# Altium PCB Ninja_ECU_PCB.PcbDoc (part 3 of 3)
Units mm, origin at the board's own origin, x right, y up, seen from the top; angles counter-clockwise.
Board outline 80.01 x 89.03 mm, 4 copper layers (Top Layer, Signal Layer 1, Signal Layer 2, Bottom Layer), stack 0.778 mm thick; 215 components, 159 nets, 825 pads, 332 vias.
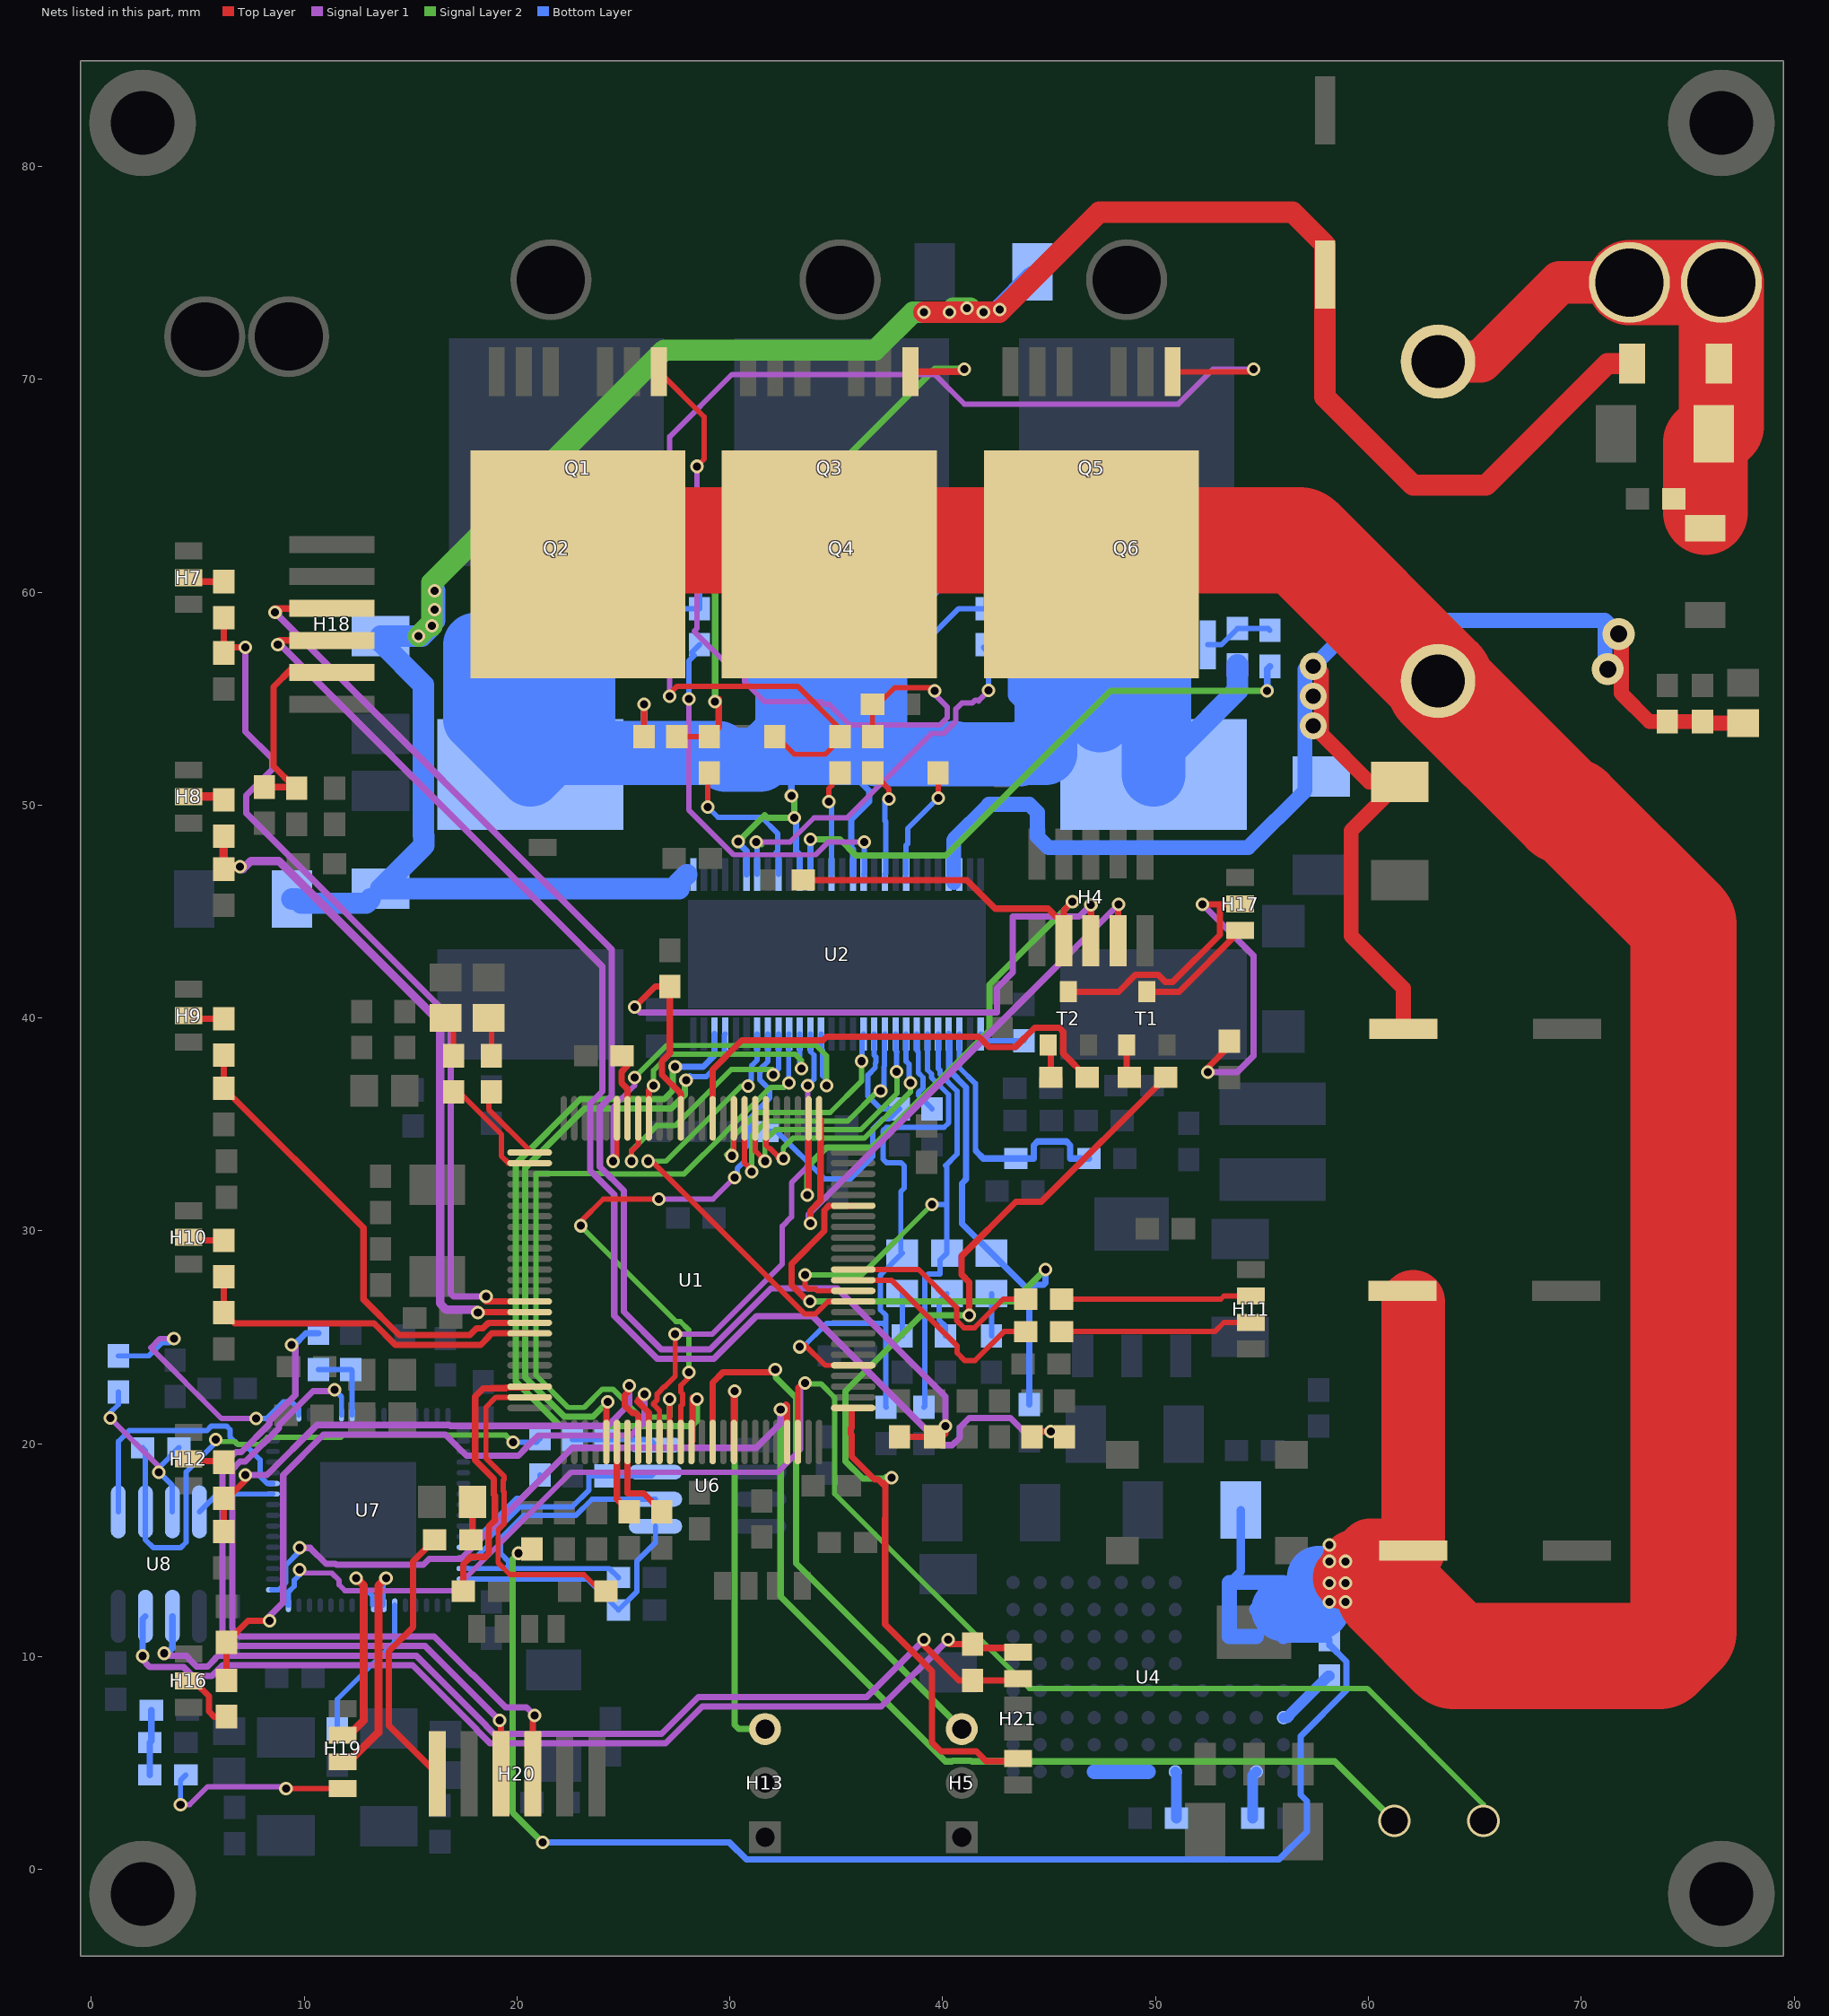
[diagram p5: the nets of this part, all layers, seen from the top]

## Via types
v1: diameter 0.635, hole 0.381, Top Layer to Bottom Layer, tented both sides, 252 vias
v2: diameter 0.584, hole 0.33, Top Layer to Bottom Layer, 44 vias
v3: diameter 0.69, hole 0.381, Top Layer to Bottom Layer, tented both sides, 16 vias
v4: diameter 1.016, hole 0.762, Top Layer to Bottom Layer, tented both sides, 11 vias
v5: diameter 1.5, hole 0.8, Top Layer to Bottom Layer, tented both sides, 3 vias
v6: diameter 1.27, hole 0.711, Top Layer to Bottom Layer, tented both sides, 3 vias
v7: diameter 1.524, hole 1.27, Top Layer to Bottom Layer, 2 vias
v8: diameter 0.635, hole 0.381, Top Layer to Bottom Layer, 1 vias

## Nets (pads, with @x,y where several pads share a name; then routed paths per layer and width w, separated by ;. In a path a pad name is that pad's centre, name@x,y a point inside that pad or via, vN(x,y) a via of type N, cw(c..) or ccw(c..) an arc to the next point about the centre after c; other vN are vias at no path point) (continued)
NetH4_4: H4.4 U1.76 | length 27.9
  Top Layer w0.3: v1(33.782,30.353) 33.782,30.952 34.258,31.428 34.258,35.222 U1.76@34.194,35.286 ; H4.4@48.235,43.637 48.235,45.314 v1(48.26,45.339)
  Signal Layer 1 w0.3: v1(33.782,30.353) 33.748,30.353 33.701,30.399 33.701,30.78 42.728,39.807 42.732,39.807 48.26,45.334 v1(48.26,45.339)
NetH4_6: H4.6 R2.2 U1.89 | length 36.3
  Top Layer w0.3: v1(25.527,40.513) 26.494,41.48 R2.2@27.178,41.48 27.178,38.336 26.812,37.97 26.812,37.335 27.683,36.464 27.694,36.464 U1.89@27.694,35.286 ; H4.6@46.965,43.637 v1(46.965,45.314)
  Signal Layer 1 w0.3: v1(25.527,40.513) 25.781,40.259 42.545,40.259 42.545,41.402 43.286,42.143 43.286,44.762 46.413,44.762 v1(46.965,45.314)
NetH4_8: H4.8 R1.2 U1.77 | length 39.9
  Top Layer w0.3: R1.2@33.45,46.482 41.13,46.482 42.473,45.14 44.95,45.14 45.466,44.623 45.466,43.866 H4.8@45.695,43.637 45.695,45.06 v1(46.101,45.466) ; v1(33.638,31.685) 33.694,31.741 33.694,32.258 U1.77@33.694,35.286
  Signal Layer 1 w0.3: v1(33.638,31.685) 33.638,31.654 33.607,31.623 v1@33.701,31.529
  Signal Layer 2 w0.3: v1(33.638,31.685) 33.638,33.02 34.543,33.925 36.702,33.925 42.2,39.423 42.2,41.565 v1(46.101,45.466)
NetH5_3: H5.3 U1.40 | length 26.5
  Top Layer w0.3: U1.40@29.194,20.086 29.194,22.876 29.686,23.368 v1@32.131,23.368
  Signal Layer 2 w0.3: v1(32.131,23.495) 32.164,23.462 32.164,23.112 33.114,22.161 33.114,14.384 H5.3@40.894,6.604
NetH7_2: H7.2 R11.2 | length 1.5
  Top Layer w0.3: H7.2@4.757,60.501 R11.2@6.223,60.501
NetH8_2: H8.2 R13.2 | length 1.7
  Top Layer w0.4: H8.2@4.572,50.399 6.073,50.399 R13.2@6.223,50.249
NetH9_2: H9.2 R15.2 | length 1.7
  Top Layer w0.3: H9.2@4.572,40.112 4.722,39.962 R15.2@6.223,39.962
NetH10_2: H10.2 R18.2 | length 1.7
  Top Layer w0.3: H10.2@4.572,29.698 4.722,29.548 R18.2@6.223,29.548
NetH11_2: H11.2 R17.1 | length 9
  Top Layer w0.25: R17.1@45.593,26.797 53.066,26.797 53.213,26.944 H11.2@54.483,26.944
NetH11_3: H11.3 R21.1 | length 9.1
  Top Layer w0.25: R21.1@45.593,25.273 52.787,25.273 53.213,25.699 H11.3@54.483,25.699
NetH12_2: H12.2 R23.2 | length 1.7
  Top Layer w0.3: H12.2@4.572,19.284 4.664,19.192 6.099,19.192 6.132,19.225 R23.2@6.223,19.134
NetH13_3: H13.3 U1.42 | length 19.6
  Top Layer w0.3: U1.42@30.194,20.086 30.194,22.447 v1(30.226,22.479)
  Signal Layer 2 w0.3: v1(30.226,22.479) 30.226,6.794 30.416,6.604 H13.3@31.655,6.604
NetH16_2: H16.2 R30.2 | length 2.5
  Top Layer w0.3: H16.2@4.93,8.74 5.524,8.145 5.524,7.43 5.764,7.19 R30.2@6.35,7.19
NetH17_2: H17.2 R87.2 T2.3 | length 24.4
  Top Layer w0.3: T2.3@45.908,41.235 48.263,41.235 49.066,42.037 50.116,42.037 50.466,41.687 50.8,41.687 53.023,43.91 53.023,45.339 ; v1(52.197,45.339) 53.023,45.339 ; v1(52.451,37.465) 52.451,37.673 53.467,38.689 R87.2@53.467,38.911 ; H17.2@53.975,45.359 53.721,45.105 53.721,45.116 53.498,45.339 53.023,45.339
  Signal Layer 1 w0.3: v1(52.197,45.339) 54.61,42.926 54.61,38.227 53.848,37.465 v1(52.451,37.465)
NetH17_3: H17.3 T1.3 | length 5.6
  Top Layer w0.3: T1.3@49.591,41.235 51.101,41.235 H17.3@53.975,44.109
NetH18_2: H18.2 R27.2 R32.1 | length 9.9
  Top Layer w0.3: R27.2@8.128,50.849 R32.1@9.545,50.849 ; H18.2@11.303,56.237 11.152,56.388 9.398,56.388 8.565,55.555 8.565,51.83 R32.1@9.545,50.849 ; R32.1@9.545,50.849 9.603,50.849 R32.1@9.652,50.8 9.594,50.8 R32.1@9.545,50.849
NetH18_3: H18.3 R26.2 R34.1 | length 68.1
  Top Layer w0.3: v1(8.763,57.531) 8.763,57.562 8.89,57.689 8.842,57.737 H18.3@11.303,57.737 ; R26.2@44.196,20.32 44.323,20.32 44.618,20.615 44.659,20.574 v1(45.085,20.574)
  Signal Layer 1 w0.3: v1(8.763,57.531) 8.89,57.531 24.003,42.418 24.003,36.55 23.439,35.986 23.439,32.83 24.567,31.702 24.567,26.012 26.59,23.988 29.248,23.988 31.263,26.002 33.879,26.002 39.946,19.935 40.445,19.935 40.798,20.288 40.798,20.761 41.246,21.209 43.18,21.209 43.815,20.574 v1(45.085,20.574)
NetH18_4: H18.4 R25.2 R36.1 | length 66.2
  Top Layer w0.3: v1(8.636,59.055) 8.636,59.072 8.526,59.182 8.581,59.237 H18.4@11.303,59.237 ; R36.1@37.973,20.32 R25.2@39.624,20.32 39.978,20.32 40.132,20.474 v1(40.132,20.828)
  Signal Layer 1 w0.3: v1@8.636,59.067 v1(8.636,59.055) 8.636,59.043 24.455,43.223 24.455,36.363 23.891,35.799 23.891,33.017 25.019,31.889 25.019,26.199 26.778,24.44 29.061,24.44 31.926,27.306 35.039,27.306 40.132,22.213 v1(40.132,20.828)
NetH19_1: H19.1 R61.2 | length 9.5
  Top Layer w0.25: v1(9.144,3.81) H19.1@11.811,3.81
  Signal Layer 1 w0.25: v1(4.191,3.048) 4.62,3.048 5.469,3.897 9.057,3.897 v1(9.144,3.81)
  Bottom Layer w0.25: v1(4.191,3.048) 4.191,4.191 R61.2@4.445,4.445
NetH20_3: H20.3 U7.38 | length 33.9
  Top Layer w0.3: H20.3@20.749,4.494 20.749,7.16 v1(20.828,7.239)
  Signal Layer 1 w0.3: v1(11.43,22.542) 11.43,22.479 10.414,22.479 8.815,20.88 8.815,20.74 7.237,19.162 6.982,19.162 6.619,18.799 6.619,11.325 6.989,10.955 16.109,10.955 17.904,9.159 17.929,9.159 19.468,7.62 20.447,7.62 v1(20.828,7.239)
  Bottom Layer w0.25: v1(11.43,22.542) 11.755,22.218 U7.38@11.755,21.366
NetH20_4: H20.4 R68.2 | length 34
  Top Layer w0.3: v1(19.177,7.002) 19.249,6.93 H20.4@19.249,4.494
  Signal Layer 1 w0.3: v1(9.398,24.638) 9.525,24.638 9.586,24.577 9.586,22.291 8.363,21.068 8.363,20.927 7.05,19.614 6.795,19.614 6.167,18.986 6.167,11.138 6.802,10.502 15.677,10.502 v1(19.177,7.002)
  Bottom Layer w0.3: v1(9.398,24.638) 9.525,24.638 10.082,25.195 R68.2@10.668,25.195
NetH20_6: H20.6 R69.1 | length 12.8
  Top Layer w0.3: R69.1@16.129,15.494 15.113,14.478 15.113,11.384 13.978,10.249 13.978,6.766 H20.6@16.249,4.494
NetH21_1: H21.1 R70.2 U8.7 | length 47.6
  Top Layer w0.3: v1(40.259,10.795) 40.259,10.639 40.308,10.59 R70.2@41.402,10.59 41.578,10.414 43.332,10.414 H21.1@43.536,10.211
  Signal Layer 1 w0.3: v1(2.413,10.033) 2.413,9.851 2.755,9.51 4.341,9.51 4.763,9.088 5.651,9.088 6.161,9.597 15.09,9.597 18.105,6.583 18.105,6.558 18.733,5.93 26.975,5.93 28.702,7.656 37.12,7.656 v1(40.259,10.795)
  Bottom Layer w0.3: v1(2.413,10.033) 2.413,11.774 U8.7@2.54,11.901
NetH21_2: H21.2 R70.1 U8.6 | length 47
  Top Layer w0.3: v1(39.116,10.795) 39.116,10.541 40.767,8.89 R70.1@41.402,8.89 43.465,8.89 H21.2@43.536,8.961
  Signal Layer 1 w0.3: v1(3.429,10.16) 3.429,10.05 4.465,10.05 4.587,9.928 4.587,9.903 4.95,9.54 5.464,9.54 5.827,9.903 5.827,9.928 5.949,10.05 15.277,10.05 18.557,6.77 18.557,6.745 18.92,6.382 26.788,6.382 28.515,8.109 36.43,8.109 v1(39.116,10.795)
  Bottom Layer w0.3: v1(3.429,10.16) 3.556,10.16 3.81,10.414 U8.6@3.81,11.901
NetH21_5: H21.5 R20.2 U1.51 | length 51.7
  Top Layer w0.3: U1.51@35.794,21.686 35.72,21.612 35.72,20.753 35.687,20.72 35.687,20.469 35.72,20.436 35.72,19.401 36.461,18.659 36.8,18.321 36.977,18.321 37.305,17.992 ; v1(37.592,18.415) 37.305,18.128 37.305,17.992 ; v1(41.245,26.041) 41.245,27.589 40.894,27.94 40.894,28.829 43.434,31.369 44.626,31.369 R20.2@50.468,37.211 ; H21.5@43.536,5.211 43.42,5.095 42.034,5.095 41.578,5.552 39.914,5.552 39.497,5.969 39.497,9.317 37.293,11.521 37.293,16.502 37.305,16.514 37.305,17.992
  Signal Layer 2 w0.3: v1(37.592,18.415) 37.636,18.459 37.369,18.459 37.272,18.362 36.248,18.362 35.433,19.177 35.433,22.479 38.995,26.041 v1(41.245,26.041)
NetLED1_1: LED1.1 R28.1 | length 1.8
  Top Layer w0.25: LED1.1@18.669,40.005 18.796,39.878 R28.1@18.796,38.227
NetLED2_1: LED2.1 R29.1 | length 1.9
  Top Layer w0.25: LED2.1@16.637,40.005 17.018,39.624 R29.1@17.018,38.227
NetLED3_1: LED3.1 R41.2 | length 2
  Bottom Layer w0.25: R41.2@42.291,25.068 LED3.1@42.291,27.052
NetLED3_2: LED3.2 R45.1 U1.70 U2.4 | length 39.1
  Top Layer w0.3: v1(33.766,26.686) 33.67,26.686 32.908,27.447 32.908,28.463 34.442,29.997 34.442,30.972 34.656,31.186 U1.70@35.794,31.186
  Signal Layer 2 w0.3: v1(33.766,26.686) 43.323,26.686 v1(44.831,28.194)
  Bottom Layer w0.3: U2.4@40.283,39.243 40.308,39.218 40.308,37.541 41.104,36.745 41.104,32.431 40.909,32.236 40.909,30.342 LED3.2@42.295,28.956 44.069,27.182 ; R45.1@44.069,21.844 44.069,27.182 ; v1(44.831,28.194) 44.831,27.559 44.743,27.471 44.358,27.471 44.069,27.182
NetLED4_1: LED4.1 R42.2 | length 2.3
  Bottom Layer w0.25: R42.2@40.132,25.068 40.132,25.52 39.827,25.825 39.827,26.688 LED4.1@40.195,27.056
NetLED4_2: LED4.2 R46.1 U1.62 U2.5 | length 29.8
  Top Layer w0.25: v1(33.528,27.94) 33.528,27.432 33.679,27.281 34.012,27.281 34.107,27.186 U1.62@35.794,27.186
  Signal Layer 2 w0.25: v1(33.528,27.94) 36.195,27.94 v1(39.497,31.242)
  Bottom Layer w0.25: R46.1@39.116,21.717 39.168,21.769 39.168,27.821 39.331,27.983 39.878,27.983 39.878,28.639 LED4.2@40.195,28.956 40.195,31.242 ; v1(39.497,31.242) 40.195,31.242 ; U2.5@39.783,39.243 39.783,37.635 39.881,37.537 39.881,37.364 40.677,36.568 40.677,33.611 40.132,33.066 40.195,33.003 40.195,31.242
NetLED5_1: LED5.1 R43.2 | length 2
  Bottom Layer w0.25: R43.2@38.1,25.068 LED5.1@38.1,27.056
NetLED5_2: LED5.2 R48.1 U1.55 U2.6 | length 31.4
  Top Layer w0.25: v1@33.407,24.517 v1@33.527,24.637 ; v1@33.527,24.638 v1@33.407,24.518 ; 34.289,23.876 v1@33.527,24.637 ; U1.55@35.794,23.686 34.48,23.686 v1@33.528,24.638 ; v1@33.407,24.518 33.286,24.397 v1(33.286,24.552) 33.372,24.552 v1@33.407,24.518
  Bottom Layer w0.25: v1(33.286,24.552) 33.372,24.552 33.407,24.517 34.544,25.654 37.196,25.654 37.323,25.527 ; R48.1@37.338,21.717 37.323,21.732 37.323,25.527 ; U2.6@39.283,39.243 39.283,37.565 39.478,37.37 39.478,37.197 40.274,36.401 40.274,35.071 40.067,34.863 37.358,34.863 37.196,34.701 37.196,33.371 37.358,33.209 38.038,33.209 38.187,33.06 38.187,32.012 38.031,31.855 38.031,29.025 LED5.2@38.1,28.956 37.073,27.929 37.073,26.291 37.323,26.041 37.323,25.527
NetLED6_1: LED6.1 R69.2 | length 1.8
  Top Layer w0.3: R69.2@17.829,15.494 17.907,15.572 LED6.1@17.907,17.272
NetQ1_1: Q1.1 R72.2 R74.1 | length 33.9
  Top Layer w0.25: Q1.1@26.67,70.358 28.789,68.239 28.789,66.254 v1(28.448,65.913) ; R72.2@36.703,53.224 R74.1@36.703,54.737 36.957,54.737 36.957,54.733 37.738,55.514 39.482,55.514 v1(39.624,55.372)
  Signal Layer 1 w0.25: v1(28.448,65.913) 28.448,58.293 28.321,58.166 30.012,56.475 30.345,56.475 30.694,56.126 30.694,55.793 31.623,54.864 34.29,54.864 34.417,54.737 34.664,54.737 35.64,53.761 39.87,53.761 40.219,54.11 40.219,54.602 39.87,54.951 39.449,55.372 v1(39.624,55.372)
NetQ2_1: Q2.1 R71.2 R73.1 | length 5.4
  Bottom Layer w0.25: Q2.1@25.654,57.531 27.354,59.231 R71.2@28.575,59.231 R73.1@28.575,61.038
NetQ2_3: Q2.3 Q4.3 Q6.3 R56.2 R73.2 R76.1 R79.2 R82.2 R86.2 U2.34 U2.39 U2.44 | length 155
  Top Layer w0.3: R56.2@25.967,53.213 v1(25.967,54.737)
  Signal Layer 2 w0.3: v1(30.389,48.296) 30.389,48.261 30.39,48.26 30.622,48.492 30.622,48.517 31.635,49.53 31.762,49.403 v1(33.02,49.403) 33.02,50.302 v1(32.891,50.431)
  Bottom Layer w0.3: Q2.3@24.384,57.531 24.384,59.182 25.019,59.817 26.543,59.817 27.305,60.579 27.305,61.595 28.448,62.738 R73.2@28.575,62.738 ; 25.781,52.451 26.035,52.705 25.967,52.773 v1(25.967,54.737) ; v1(30.389,48.296) 30.389,48.237 30.783,47.842 U2.34@30.783,46.743 ; 32.073,52.451 32.891,51.632 v1(32.891,50.431) ; v1(33.02,49.403) 33.052,49.435 33.147,49.34 33.113,49.306 33.113,47.835 33.283,47.665 U2.39@33.283,46.743 ; U2.44@35.783,46.743 35.783,47.922 35.702,48.003 35.702,49.328 36.543,50.169 36.543,50.669 36.166,51.046 36.166,51.787 36.83,52.451 ; Q4.3@37.782,57.531 37.782,59.118 38.481,59.817 39.521,59.817 40.894,61.19 40.894,61.595 R76.1@42.037,62.738 R76.1@42.037,62.516 ; Q6.3@51.181,57.531 51.424,57.774 51.774,58.124 51.774,58.799
  Bottom Layer w1: 43.878,54.089 43.878,54.877 43.561,55.195 43.561,58.547 51.424,58.547 Q6.3@51.424,57.774 ; R79.2@49.905,51.44 R79.2@51.181,52.716 ; Q6.3@51.181,57.531 R79.2@51.181,52.716 ; R82.2@53.848,56.593 53.848,55.383 R79.2@51.181,52.716
  Bottom Layer w3: 37.025,57.531 Q4.3@36.512,57.531 ; R79.2@47.371,53.974 Q6.3@47.371,57.531 ; R79.2@49.905,51.44 Q6.3@49.905,57.525 ; 50.424,57.531 Q6.3@49.911,57.531 Q6.3@47.371,57.531 ; Q2.3@20.574,57.531 Q2.3@23.114,57.531 23.114,53.929 R86.2@21.636,52.451 ; Q2.3@20.574,57.531 Q2.3@19.304,57.531 Q2.3@18.034,57.531 18.034,54.031 R86.2@20.625,51.44 ; Q2.3@20.574,57.531 20.625,57.48 R86.2@20.625,51.44 ; R86.2@20.625,51.44 R86.2@21.636,52.451 ; R86.2@21.636,52.451 25.781,52.451 29.472,52.451 29.791,52.132 31.423,52.132 31.742,52.451 ; 31.742,52.451 32.073,52.451 35.306,52.451 ; 31.742,52.451 32.704,53.413 32.704,56.061 31.941,56.824 31.941,57.531 Q4.3@32.703,57.531 Q4.3@33.972,57.531 Q4.3@34.02,57.578 ; Q4.3@34.02,57.578 35.306,56.292 35.306,52.451 ; Q4.3@34.02,57.578 36.465,57.578 Q4.3@36.512,57.531 ; 35.306,52.451 36.83,52.451 ; Q4.3@36.512,57.531 36.83,57.213 36.83,52.451 ; 36.83,52.451 36.895,52.386 40.44,52.386 40.505,52.451 40.546,52.451 40.611,52.386 43.615,52.386 43.68,52.451 44.831,52.451 44.831,53.602 44.896,53.667 44.896,57.466 Q6.3@44.831,57.531 Q6.3@46.101,57.531 Q6.3@47.371,57.531
NetQ3_1: Q3.1 R77.2 R78.1 | length 27.4
  Top Layer w0.25: R78.1@27.503,53.213 R77.2@29.038,53.213
  Top Layer w0.3: R77.2@29.038,53.213 29.479,53.654 v1@29.479,54.994 ; Q3.1@38.481,70.358 40.894,70.358 v1(41.021,70.485)
  Signal Layer 2 w0.3: v1(29.307,54.864) 29.307,60.168 39.624,70.485 v1(41.021,70.485)
NetQ4_1: Q4.1 R75.2 R76.2 | length 5.5
  Bottom Layer w0.25: Q4.1@39.052,57.531 40.752,59.231 R75.2@42.037,59.231 R76.2@42.037,61.038
NetQ5_1: Q5.1 R81.2 R83.1 | length 59.4
  Top Layer w0.25: v8(27.178,55.118) 27.178,55.245 27.519,55.586 33.187,55.586 35.179,53.594 R81.2@35.179,53.213 35.179,53.082 34.482,52.386 33.029,52.386 32.385,53.029 32.385,53.213 R83.1@32.108,53.213 ; Q5.1@50.8,70.358 54.483,70.358 v1(54.61,70.485)
  Signal Layer 1 w0.25: v8(27.178,55.118) 27.178,67.31 30.099,70.231 39.624,70.231 41.021,68.834 51.054,68.834 52.705,70.485 v1(54.61,70.485)
NetQ6_1: Q6.1 R80.2 R82.1 | length 3.3
  Bottom Layer w0.25: Q6.1@52.451,57.531 53.086,57.531 R82.1@53.848,58.293 55.294,58.293 R80.2@55.372,58.215
NetR3_2: R3.2 U1.24 | length 16
  Top Layer w0.25: U1.24@20.594,22.186 19.011,22.186 18.542,21.717 18.542,19.323 19.389,18.476 19.389,18.325 19.344,18.28 19.344,17.788 19.389,17.743 19.389,16.23 19.109,15.95 19.109,14.419 19.67,13.858 23.144,13.858 24.179,12.823 R3.2@24.179,13.081
NetR4_2: R4.2 U1.23 | length 13.3
  Top Layer w0.3: R4.2@17.477,13.081 17.477,14.343 17.825,14.692 18.504,14.692 18.681,14.869 18.681,16.127 18.961,16.407 18.961,17.566 18.917,17.611 18.917,18.344 18.034,19.227 18.034,22.225 18.415,22.606 18.827,22.606 18.834,22.613 19.482,22.613 19.507,22.638 20.546,22.638 U1.23@20.594,22.686
NetR6_2: R6.2 U1.94 | length 3.3
  Top Layer w0.3: R6.2@24.941,38.227 25.194,37.974 25.194,37.755 24.907,37.468 24.907,36.954 25.194,36.667 U1.94@25.194,35.286
NetR9_2: R9.2 U1.31 | length 3.5
  Top Layer w0.3: U1.31@24.694,20.086 24.694,17.392 R9.2@25.273,16.813
NetR10_2: R10.2 U1.32 | length 4.4
  Top Layer w0.3: U1.32@25.194,20.086 25.194,17.665 25.945,17.665 R10.2@26.797,16.813
NetR11_1: R11.1 R12.1 U1.15 | length 42.1
  Top Layer w0.3: R11.1@6.223,58.801 R12.1@6.223,57.15 6.477,57.404 v1(7.239,57.404) ; v1(18.542,26.924) 18.542,26.686 U1.15@20.594,26.686
  Signal Layer 1 w0.3: v1(7.239,57.404) 7.239,53.455 8.494,52.2 8.494,51.686 7.272,50.464 7.272,49.624 16.891,40.005 16.891,27.051 17.018,26.924 v1(18.542,26.924)
NetR13_1: R13.1 R14.1 U1.16 | length 32.8
  Top Layer w0.3: v1(18.161,26.162) 18.185,26.186 U1.16@20.594,26.186
  Top Layer w0.4: R13.1@6.223,48.549 R14.1@6.223,46.99 6.35,47.117 v1(6.985,47.117)
  Signal Layer 1 w0.4: v1(6.985,47.117) 7.112,46.99 7.493,47.371 8.815,47.371 16.389,39.797 16.389,26.589 16.683,26.295 18.122,26.295 18.161,26.255 v1(18.161,26.162)
NetR15_1: R15.1 R16.1 U1.17 | length 22.9
  Top Layer w0.3: R15.1@6.223,38.262 R16.1@6.223,36.703 12.787,30.139 12.787,26.786 14.467,25.106 17.782,25.106 18.109,25.433 18.411,25.433 18.664,25.686 U1.17@20.594,25.686
NetR17_2: R17.2 U1.64 | length 10.2
  Top Layer w0.25: U1.64@35.794,28.186 38.87,28.186 40.65,26.406 40.65,25.795 40.999,25.446 41.492,25.446 42.842,26.797 R17.2@43.893,26.797
NetR18_1: R18.1 R19.1 U1.18 | length 16.9
  Top Layer w0.3: R18.1@6.223,27.848 R19.1@6.223,26.162 6.731,25.654 13.279,25.654 14.279,24.653 14.336,24.653 14.326,24.644 18.294,24.644 18.669,25.019 18.669,25.051 18.804,25.186 U1.18@20.594,25.186
NetR20_1: R20.1 T1.1 | length 1.6
  Top Layer w0.3: T1.1@48.641,38.735 48.641,37.338 R20.1@48.768,37.211
NetR21_2: R21.2 U1.63 | length 10.4
  Top Layer w0.25: U1.63@35.794,27.686 37.592,27.686 40.68,24.598 40.68,24.265 41.029,23.916 41.521,23.916 42.878,25.273 R21.2@43.893,25.273
NetR22_1: R22.1 T2.1 | length 1.6
  Top Layer w0.3: T2.1@44.958,38.735 45.085,38.608 R22.1@45.085,37.211
NetR22_2: R22.2 U1.86 | length 22.6
  Top Layer w0.3: U1.86@29.194,35.286 29.194,37.576 30.567,38.949 34.379,38.949 34.547,39.116 41.702,39.116 42.174,38.645 43.424,38.645 44.317,39.537 45.483,39.537 45.66,39.36 45.66,38.336 R22.2@46.785,37.211
NetR23_1: R23.1 R24.1 U1.33 | length 26.7
  Top Layer w0.3: R24.1@6.223,15.875 R23.1@6.223,17.434 6.385,17.434 7.366,18.415 v1(7.239,18.542) ; v1(25.273,22.733) 25.273,22.504 25.061,22.293 25.061,21.793 25.414,21.441 25.575,21.441 25.694,21.322 U1.33@25.694,20.086
  Signal Layer 1 w0.3: v1(7.239,18.542) 7.242,18.539 8.252,18.539 10.597,20.884 16.827,20.884 16.867,20.844 24.257,20.844 25.273,21.86 v1(25.273,22.733)
NetR28_2: R28.2 U1.1 | length 4
  Top Layer w0.25: R28.2@18.796,36.527 18.441,36.172 18.67,36.172 18.67,35.699 20.594,33.775 U1.1@20.594,33.686
NetR29_2: R29.2 U1.2 | length 5.6
  Top Layer w0.25: R29.2@17.018,36.527 17.273,36.527 19.267,34.534 19.267,33.509 19.59,33.186 U1.2@20.594,33.186
NetR30_1: R30.1 R31.1 U1.34 | length 34.5
  Top Layer w0.3: R30.1@6.35,8.89 R31.1@6.35,10.668 7.366,11.684 v1(8.382,11.684) ; 25.719,22.098 25.973,22.352 25.988,22.336 v1(25.988,22.335) 25.988,22.317 25.664,21.992 26.194,21.462 U1.34@26.194,20.086
  Signal Layer 1 w0.3: v1(8.382,11.684) 8.382,11.855 8.35,11.887 9.017,12.554 9.017,18.542 10.907,20.432 16.64,20.432 17.626,19.446 20.069,19.446 20.432,19.809 20.432,19.834 20.555,19.958 20.99,20.392 25.35,20.392 25.988,21.03 v1(25.988,22.335)
NetR38_2: R38.2 U4.2 | length 3
  Bottom Layer w0.5: U4.2@56.007,7.137 56.208,7.137 56.303,7.232 56.303,7.283 58.115,9.095 R38.2@58.166,9.095
NetR39_2: R39.2 U4.6 | length 2.2
  Bottom Layer w0.5: U4.6@50.927,4.597 50.976,4.548 R39.2@50.976,2.413
NetR40_2: R40.2 U4.8 | length 2.3
  Bottom Layer w0.5: R40.2@54.561,2.413 54.561,4.421 U4.8@54.737,4.597
NetR44_2: R44.2 R47.1 U2.11 | length 14.1
  Bottom Layer w0.25: R47.1@31.75,34.671 32.213,34.671 34.437,32.447 35.667,32.447 36.712,33.491 36.712,34.786 37.191,35.266 37.503,35.266 R44.2@37.973,35.736 37.083,35.736 36.489,36.33 36.489,37.324 36.831,37.666 36.831,37.883 36.86,37.912 36.86,38.173 36.783,38.251 U2.11@36.783,39.243
NetR50_2: R50.2 U2.7 | length 4
  Bottom Layer w0.25: U2.7@38.783,39.243 38.783,38.481 38.855,38.409 38.855,37.424 39.076,37.203 39.076,36.711 38.86,36.495 38.86,36.373 R50.2@39.497,35.736
NetR51_2: R51.2 U2.1 | length 2.2
  Bottom Layer w0.25: U2.1@41.783,39.243 42.086,38.94 R51.2@43.815,38.94
NetR52_1: R52.1 R53.1 U2.3 | length 12.6
  Bottom Layer w0.25: U2.3@40.783,39.243 40.783,37.67 41.532,36.922 41.532,33.779
  Bottom Layer w0.3: 41.557,33.779 41.557,33.754 41.91,33.401 R53.1@43.434,33.401 44.282,33.401 44.282,34.026 44.459,34.203 45.809,34.203 45.986,34.026 45.986,33.401 R52.1@46.863,33.401
NetR55_1: R55.1 U2.49 | length 5.5
  Top Layer w0.25: v1@39.785,50.257 v1(39.785,50.333) R55.1@39.785,51.513
  Bottom Layer w0.25: U2.49@38.283,46.743 38.283,48.115 38.357,48.188 38.357,48.905 v1(39.785,50.333)
NetR57_1: R57.1 R58.1 U6.4 | length 4
  Bottom Layer w0.25: R58.1@22.606,20.193 R57.1@24.13,20.193 26.252,20.193 U6.4@26.506,19.939
NetR57_2: R57.2 U6.3 U7.61 | length 11.3
  Bottom Layer w0.25: U7.61@17.429,14.641 U7.61@17.48,14.641 18.052,14.641 18.656,15.246 18.656,15.547 20.146,17.037 22.592,17.037 23.383,17.828 23.383,18.493 R57.2@24.13,18.493 26.33,18.493 U6.3@26.506,18.669
NetR59_1: R59.1 U6.1 U7.63 | length 12.6
  Bottom Layer w0.25: U7.63@17.429,13.641 U7.63@17.48,13.641 23.316,13.641 R59.1@24.765,12.192 25.638,13.065 25.638,14.493 26.506,15.362 U6.1@26.506,16.129
NetR60_1: R60.1 U6.2 U7.62 | length 17.2
  Bottom Layer w0.25: U7.62@17.429,14.141 U7.62@17.48,14.141 19.475,14.141 ; R60.1@24.765,13.716 24.34,14.141 19.475,14.141 ; U6.2@26.506,17.399 23.523,17.399 22.759,16.634 20.312,16.634 19.235,15.556 19.235,14.849 19.601,14.483 19.601,14.267 19.475,14.141
NetR61_1: R61.1 R62.2 R63.2 | length 3.1
  Bottom Layer w0.3: R61.1@2.745,4.445 R62.2@2.745,5.969 2.823,6.047 R63.2@2.823,7.488
NetR64_1: R64.1 U7.6 | length 6.9
  Bottom Layer w0.25: R64.1@11.557,6.604 11.557,8.001 14.255,10.699 U7.6@14.255,12.416
NetR65_1: R65.1 U7.60 | length 5.3
  Bottom Layer w0.25: U7.60@17.48,15.141 17.983,15.141 18.254,15.412 18.254,15.714 19.979,17.439 20.185,17.439 21.082,18.336 R65.1@21.082,18.542
NetR65_2: R65.2 R66.2 U8.2 | length 27.7
  Signal Layer 2 w0.25: v1(5.842,20.193) 5.929,20.106 6.739,20.106 6.866,19.979 7.949,19.979 8.268,20.299 11.724,20.299 11.832,20.407 19.471,20.407 v1(19.812,20.066)
  Bottom Layer w0.25: R66.2@2.413,19.812 2.54,19.685 U8.2@2.54,16.801 2.54,15.494 2.921,15.113 4.191,15.113 4.453,15.375 4.453,18.677 5.842,20.066 v1(5.842,20.193) ; v1(19.812,20.066) 20.906,20.066 R65.2@21.082,20.242
NetR66_1: R66.1 R88.2 U8.3 | length 8.5
  Signal Layer 1 w0.25: v1(0.889,21.209) 3.175,18.923 v1(3.175,18.669)
  Bottom Layer w0.25: v1(0.889,21.209) 0.889,21.463 1.27,21.844 R88.2@1.27,22.43 ; U8.3@3.81,16.801 3.81,18.034 v1(3.175,18.669) 3.175,18.874 R66.1@4.113,19.812
NetR67_2: R67.2 R68.1 U7.39 | length 3.7
  Bottom Layer w0.25: R68.1@10.668,23.495 R67.2@12.192,23.495 12.255,23.432 U7.39@12.255,21.366
NetR71_1: R71.1 U2.45 | length 19
  Signal Layer 1 w0.25: v1(28.067,54.991) 28.067,49.776 30.178,47.665 34.028,47.665 34.623,48.26 v1(36.322,48.26)
  Bottom Layer w0.25: v1(28.067,54.991) 28.067,56.769 28.321,57.023 28.194,57.15 R71.1@28.575,57.531 ; U2.45@36.283,46.743 36.322,46.782 v1(36.322,48.26)
NetR72_1: R72.1 U2.47 | length 5.3
  Top Layer w0.25: R72.1@36.714,51.513 37.465,50.762 v1(37.465,50.292)
  Bottom Layer w0.25: U2.47@37.283,46.743 37.319,46.779 37.319,49.229 37.283,49.265 37.283,50.22 37.355,50.292 v1(37.465,50.292)
NetR75_1: R75.1 U2.35 | length 18.2
  Signal Layer 1 w0.25: v1(31.242,48.26) 32.838,48.26 32.838,48.285 33.957,49.403 35.505,49.403 39.461,53.359 40.037,53.359 40.621,53.943 40.621,54.519 40.897,54.795 41.387,54.795 41.526,54.933 41.641,54.933 41.683,54.891 42.164,55.372 v1(42.148,55.388)
  Signal Layer 2 w0.25: v1(31.242,48.26) 31.369,48.26 v1@31.496,48.133
  Bottom Layer w0.25: v1(31.242,48.26) 31.283,48.219 U2.35@31.283,46.743 ; R75.1@41.91,57.404 42.164,57.15 42.148,57.134 v1(42.148,55.388)
NetR77_1: R77.1 U2.37 | length 7.6
  Top Layer w0.25: v1(28.956,49.911) 28.956,51.177 28.829,51.304 R77.1@29.038,51.513
  Bottom Layer w0.25: v1@28.956,49.915 v1(28.956,49.911) 29.443,49.424 31.488,49.424 32.239,48.673 32.239,47.847 32.152,47.76 32.185,47.727 32.185,47.658 32.283,47.56 U2.37@32.283,46.743
NetR80_1: R80.1 U2.40 | length 28
  Signal Layer 2 w0.3: v1(33.782,48.387) 35.179,48.387 35.926,47.64 40.147,47.64 43.274,50.767 47.879,55.372 v1(55.245,55.372)
  Bottom Layer w0.3: v1(33.782,48.387) v1(33.782,48.387) U2.40@33.783,46.743 ; v1@55.372,55.499 v1(55.245,55.372) 55.245,56.388 R80.1@55.372,56.515
NetR81_1: R81.1 U2.42 | length 5.2
  Top Layer w0.25: v1(34.646,50.165) 34.646,50.776 34.798,50.929 34.798,51.132 R81.1@35.179,51.513
  Bottom Layer w0.25: v1@34.646,50.317 v1(34.646,50.165) 34.783,50.028 U2.42@34.783,46.743
NetR88_1: R88.1 U7.34 | length 13.3
  Signal Layer 1 w0.25: v1(3.876,24.945) 3.228,24.945 2.794,24.511 6.121,21.184 v1(7.743,21.184)
  Bottom Layer w0.25: R88.1@1.27,24.13 2.7,24.13 3.322,24.752 3.684,24.752 v1(3.876,24.945) ; v1(7.743,21.184) 8.23,21.184 9.017,21.971 9.419,21.971 9.755,21.635 U7.34@9.755,21.366
NetU1_30: U1.30 U2.25 | length 29.8
  Top Layer w0.3: U1.30@24.194,20.086 24.194,22.035 v1(24.257,21.971)
  Signal Layer 2 w0.3: v1(24.257,21.971) 23.566,21.28 22.225,21.28 20.391,23.114 20.391,32.964 23.17,35.743 27.234,35.743 27.884,36.393 27.884,37.028 v1(27.94,37.084)
  Bottom Layer w0.25: v1@28.111,37.255 28.897,37.255 29.735,38.094 29.735,39.195 U2.25@29.783,39.243
  Bottom Layer w0.3: v1(27.94,37.084) v1@28.111,37.255
NetU1_35: U1.35 U2.17 | length 23.7
  Top Layer w0.25: U1.35@26.694,20.086 26.694,21.566 26.416,21.844 26.416,21.892 26.583,22.059 26.583,22.344 26.932,22.693 26.956,22.693 27.432,23.169 v1(27.432,25.146)
  Signal Layer 1 w0.25: v1(27.432,25.146) 29.162,25.146 32.464,28.448 32.464,30.226 32.893,30.655 32.893,32.258 33.655,33.02 v1(33.655,36.83)
  Bottom Layer w0.25: v1@33.456,36.83 v1(33.655,36.83) 33.953,37.128 33.953,38.256 33.783,38.426 U2.17@33.783,39.243
NetU1_36: U1.36 U2.19 | length 36.4
  Top Layer w0.25: v1(27.178,22.098) 27.178,20.102 U1.36@27.194,20.086
  Signal Layer 2 w0.25: v1(27.178,22.098) 27.178,21.255 25.814,21.255 24.503,22.566 24.011,22.566 23.152,21.708 22.402,21.708 20.888,23.222 20.888,32.697 24.247,32.697 24.265,32.679 27.853,32.679 29.76,34.586 29.76,34.6 31.119,35.959 31.119,35.957 31.906,36.743 32.552,36.743 v1(32.766,36.957)
  Bottom Layer w0.25: U2.19@32.783,39.243 32.763,39.223 v1@32.763,36.96 ; v1@32.763,36.96 32.763,36.833 32.766,36.835 v1(32.766,36.957) v1@32.763,36.96
NetU1_37: U1.37 U2.21 | length 28.8
  Top Layer w0.25: v1(23.003,30.242) 23.003,30.448 24.051,31.496 v1(26.67,31.496) ; U1.37@27.694,20.086 27.694,21.773 27.773,21.852 27.773,22.344 27.694,22.423 27.694,22.741 28.194,23.241 v1(28.067,23.368)
  Signal Layer 1 w0.25: v1(26.67,31.496) 29.21,31.496 v1(30.226,32.512)
  Signal Layer 2 w0.25: v1(23.003,30.242) 23.003,30.21 27.472,25.741 27.678,25.741 28.067,25.352 v1(28.067,23.368)
  Bottom Layer w0.25: v1@30.126,32.512 v1(30.226,32.512) 30.345,32.631 30.345,32.933 30.694,33.282 30.694,33.873 30.923,34.101 30.923,35.286 31.877,36.24 31.877,36.624 31.409,37.092 31.409,37.414 31.434,37.439 31.434,37.609 31.783,37.958 U2.21@31.783,39.243
NetU1_38: U1.38 U2.26 | length 36.2
  Top Layer w0.3: U1.38@28.194,20.086 28.242,20.134 v1@28.242,22.098 ; v1(28.448,22.098) v1@28.321,22.098 ; v1@28.242,22.098 28.242,22.177 v1@28.321,22.098 ; v1@28.242,22.098 v1@28.321,22.098
  Signal Layer 2 w0.3: v1(27.432,37.713) 27.32,37.601 27.32,36.591 26.924,36.195 22.982,36.195 19.939,33.152 19.939,22.927 22.038,20.828 28.194,20.828 28.448,21.082 v1(28.448,22.098)
  Bottom Layer w0.3: v1(27.432,37.713) 28.746,37.713 29.283,38.251 U2.26@29.283,39.243
NetU1_47: U1.47 U7.17 | length 73.2
  Top Layer w0.3: v1(32.385,21.606) 32.401,21.606 32.639,21.844 32.694,21.789 U1.47@32.694,20.086
  Signal Layer 1 w0.3: v1(9.779,15.113) 10.287,15.113 10.287,15.093 11.023,14.357 11.472,14.357 11.511,14.318 15.601,14.318 15.872,14.59 17.372,14.59 22.594,19.812 31.242,19.812 32.385,20.955 v1(32.385,21.606)
  Signal Layer 2 w0.3: v1(32.385,21.606) 32.385,12.827 40.132,5.08 40.422,5.08 40.458,5.116 41.33,5.116 41.366,5.08 58.42,5.08 v7(61.214,2.286)
  Bottom Layer w0.25: U7.17@8.479,13.141 U7.17@8.53,13.141 8.799,13.141 9.132,13.474 9.132,14.292 9.779,14.938 v1(9.779,15.113)
NetU1_48: U1.48 U7.16 | length 78.6
  Top Layer w0.25: U1.48@33.194,20.086 33.194,22.653 33.401,22.86 v1(33.528,22.86)
  Signal Layer 1 w0.25: v1(9.779,14.097) 9.946,13.93 11.295,13.93 11.644,13.581 11.644,13.375 11.921,13.098 12.692,13.098 12.71,13.116 13.579,13.116 13.597,13.098 16.98,13.098 22.551,18.669 32.258,18.669 33.332,19.743 33.332,22.791 33.395,22.727 v1(33.528,22.86)
  Signal Layer 2 w0.25: v1(33.528,22.86) 33.568,22.82 34.282,22.82 34.925,22.177 34.925,17.653 44.069,8.509 59.944,8.509 65.405,3.048 v7(65.405,2.286)
  Bottom Layer w0.25: U7.16@9.255,12.416 9.255,13.028 9.535,13.308 9.535,13.599 9.779,13.843 v1(9.779,14.097)
NetU1_61: U1.61 U2.22 | length 21.8
  Top Layer w0.25: v1(26.162,33.274) 26.337,33.274 33.52,26.091 34.012,26.091 34.607,26.686 U1.61@35.794,26.686
  Signal Layer 2 w0.25: v1(26.162,33.274) 27.003,33.274 30.535,36.806 v1(30.853,36.806)
  Bottom Layer w0.25: v1(30.853,36.806) 30.964,36.806 30.988,36.83 30.861,36.957 31.007,37.103 31.007,37.58 31.032,37.605 31.032,37.776 31.283,38.027 U2.22@31.283,39.243
NetU1_81: U1.81 U2.8 | length 12.9
  Top Layer w0.25: U1.81@31.694,35.286 31.694,34.02 31.845,33.869 31.895,33.869 32.243,33.52 32.243,33.47 32.44,33.274 32.512,33.346 v1(32.512,33.401)
  Signal Layer 2 w0.25: v1(32.512,33.401) 32.512,33.909 32.956,34.353 36.314,34.353 38.481,36.52 v1(38.481,36.957)
  Bottom Layer w0.25: U2.8@38.283,39.243 38.283,37.972 38.423,37.831 38.423,37.194 38.423,37.015 v1(38.481,36.957)
NetU1_82: U1.82 U2.9 | length 13.5
  Top Layer w0.25: U1.82@31.194,35.286 31.194,33.758 31.648,33.303 v1(31.648,33.274)
  Signal Layer 2 w0.25: v1(31.648,33.274) 31.648,34.265 31.656,34.257 32.154,34.755 36.147,34.755 37.86,36.468 37.86,37.578 37.829,37.546 v1(37.829,37.47) 37.724,37.47 v1@37.719,37.465
  Bottom Layer w0.25: U2.9@37.783,39.243 37.783,38.481 37.856,38.408 37.856,38.404 37.829,38.377 v1(37.829,37.47)
NetU1_83: U1.83 U2.10 | length 14
  Top Layer w0.25: U1.83@30.694,35.286 30.694,33.187 31.031,32.85 v1(31.031,32.778)
  Signal Layer 2 w0.25: v1(31.031,32.778) 31.031,34.46 31.729,35.158 35.539,35.158 36.957,36.576 v1(37.084,36.576)
  Bottom Layer w0.25: v1(37.084,36.576) 37.234,36.726 37.234,37.716 37.263,37.745 37.263,39.223 U2.10@37.283,39.243
NetU1_84: U1.84 U2.12 | length 12.4
  Top Layer w0.25: v1(30.099,33.528) 30.194,33.623 U1.84@30.194,35.286
  Signal Layer 2 w0.25: v1(30.099,33.528) 29.893,33.528 29.845,33.576 30.162,33.893 30.162,34.433 31.177,35.448 31.18,35.448 31.292,35.56 34.71,35.56 36.195,37.045 v1(36.195,37.973)
  Bottom Layer w0.25: v1(36.195,37.973) 36.21,37.988 36.21,39.17 U2.12@36.283,39.243
NetU1_92: U1.92 U2.18 | length 12
  Top Layer w0.3: U1.92@26.194,35.286 26.194,36.608 v1(26.416,36.83)
  Signal Layer 2 w0.25: v1(26.416,36.83) 26.416,37.539 27.186,38.308 33.066,38.308 33.358,38.016 v1(33.358,37.617)
  Bottom Layer w0.25: U2.18@33.283,39.243 33.283,37.804 v1@33.469,37.617 ; v1(33.358,37.617) v1@33.469,37.617 ; v1@33.528,37.558 v1@33.469,37.617
NetU1_93: U1.93 U2.20 | length 12.9
  Top Layer w0.25: v1(25.375,33.274) 25.375,33.741 25.694,34.06 U1.93@25.694,35.286
  Signal Layer 2 w0.25: v1(25.375,33.274) 25.375,33.757 26.564,34.946 27.428,34.946 30.067,37.585 31.997,37.585 v1@32.004,37.592
  Bottom Layer w0.25: v1(32.029,37.338) 32.029,37.363 32.283,37.617 U2.20@32.283,39.243
NetU1_95: U1.95 U2.16 | length 20.3
  Top Layer w0.25: v1@24.694,33.33 U1.95@24.694,35.286
  Signal Layer 1 w0.25: v1(24.511,33.274) 24.511,35.814 25.527,36.83 v1(25.527,37.211)
  Signal Layer 2 w0.25: v1(25.527,37.211) 25.527,37.219 27.019,38.711 34.06,38.711 34.544,38.227 v1(34.544,36.83)
  Bottom Layer w0.25: U2.16@34.283,39.243 34.283,38.554 34.356,38.481 34.356,37.291 34.544,37.102 v1(34.544,36.83) v1@34.353,36.83
NetU4_9: U4.9 U4.10 U4.11 | length 2.5
  Bottom Layer w0.7: U4.9@47.117,4.597 U4.10@48.387,4.597 U4.11@49.657,4.597
NetU7_26: U7.26 U8.4 | length 3.8
  Bottom Layer w0.25: U8.4@5.08,16.801 5.92,17.641 U7.26@8.53,17.641
NetU7_27: U7.27 U8.1 | length 12.6
  Bottom Layer w0.25: U8.1@1.27,16.801 1.27,20.111 1.784,20.625 2.417,20.625 2.428,20.614 5.422,20.614 5.645,20.837 6.341,20.837 6.517,20.661 6.517,20.328 6.866,19.979 7.199,19.979 7.927,19.251 7.927,18.474 8.261,18.141 U7.27@8.53,18.141
PVDD1: C47.2 C49.2 C50.2 C55.2 C77.2 D4.2 U2.29 | length 125.4
  Top Layer w1: v1(39.116,73.152) v1(40.309,73.152) v1(41.91,73.152) 42.659,73.152 47.358,77.851 56.435,77.851 57.959,76.327 C77.2@57.959,74.93 57.959,69.168 62.103,65.024 65.516,65.024 71.231,70.739 D4.2@72.39,70.739
  Signal Layer 1 w1: v1(39.116,73.152) v1(40.309,73.152) v1(41.91,73.152) 42.545,73.152 v1(42.672,73.279)
  Signal Layer 2 w0.25: v1@42.545,73.152 v1(42.672,73.279)
  Signal Layer 2 w1: v1(15.367,57.94) 15.847,58.42 v1(16.002,58.42) 16.002,60.452 26.924,71.374 36.83,71.374 38.608,73.152 v1(39.116,73.152) v1(40.309,73.152) 40.5,73.342 v1(41.148,73.342) 41.288,73.342 41.479,73.152 v1(41.91,73.152) v1@42.545,73.152
  Bottom Layer w0.25: C55.2@44.224,74.831 C55.2@44.224,75.057
  Bottom Layer w0.3: C50.2@13.109,45.593 C50.2@13.589,46.073
  Bottom Layer w1: C47.2@9.426,45.593 9.652,45.593 9.86,45.385 12.901,45.385 C50.2@13.109,45.593 ; v1(16.129,60.071) v1(16.129,59.182) 16.129,58.67 15.882,58.423 15.882,58.3 15.522,57.94 v1(15.367,57.94) C49.2@13.589,57.94 13.589,57.658 15.597,55.65 15.597,48.57 15.621,48.546 15.621,48.105 C50.2@13.589,46.073 27.613,46.073 27.613,46.375 27.981,46.743 ; v1(42.672,73.279) C55.2@44.224,74.831
PVDD2: C40.2 C54.2 C75.1 C76.2 R89.1 R90.1 U2.53 U2.54 | length 75.9
  Top Layer w0.7: v6@57.785,56.261 57.785,53.34 60.043,51.082 C40.2@61.468,51.082 59.182,48.796 59.182,43.862 61.642,41.402 C76.2@61.642,39.497 ; v5@71.755,57.912 v5(71.755,58.039) ; v5@71.882,57.658 71.882,55.245 73.201,53.926 C75.1@74.041,53.926 R89.1@75.692,53.926 75.765,53.853 R90.1@77.597,53.853
  Bottom Layer w0.7: 40.513,46.355 40.513,48.367 42.14,49.994 42.14,50.018 42.16,50.038 44.069,50.038 44.45,49.657 44.45,48.514 44.958,48.006 54.356,48.006 57.023,50.673 v6@57.023,56.134 ; v6@57.023,56.388 v6@57.023,56.134 ; v5(71.247,56.388) 71.12,56.515 71.12,58.674 ; v5(71.755,58.039) 71.12,58.674 ; v6@57.023,56.134 v6(57.404,56.515) 59.563,58.674 71.12,58.674
  other v6: 57.404,53.721 57.404,55.118
USB_N: H19.2 U7.7 | length 11
  Top Layer w0.381: H19.2@11.811,5.06 12.002,5.251 12.292,5.251 13.485,6.444 13.485,13.335 v1(13.843,13.693)
  Bottom Layer w0.25: U7.7@13.704,12.416 13.704,13.554 v1(13.843,13.693)
USB_P: H19.3 U7.8 | length 9.7
  Top Layer w0.381: H19.3@11.811,6.305 12.002,6.495 12.286,6.495 12.804,7.013 12.804,13.335 v1(12.446,13.693)
  Bottom Layer w0.2: U7.8@13.204,12.416 13.204,12.866
  Bottom Layer w0.25: v1(12.446,13.693) 12.446,13.624 13.204,12.866
V_BATT: C73.1 C74.2 D1.1 D4.1 L3.2 pad.2@72.263,74.549 pad.2@76.581,74.549 | length 26
  Top Layer w2: L3.2@63.273,70.834 65.273,70.834 68.988,74.549 pad.2@72.263,74.549
  Top Layer w4: pad.2@72.263,74.549 pad.2@76.581,74.549 76.581,67.79 C74.2@76.228,67.437 75.835,67.044 75.835,63.754
V_MOTOR: C18.2 C28.2 C31.2 L3.1 Q1.2 Q3.2 Q5.2 R7.2 R38.1 U4.1 | length 206.7
  Top Layer w0.3: v1(20.066,14.859) 20.398,14.859 20.652,15.113 R7.2@20.701,15.064
  Top Layer w3: v1@58.879,13.715 59.316,14.152 59.316,14.471 59.565,14.471 60.08,14.986 C28.2@62.103,14.986 62.103,26.67
  Top Layer w4.5: Q1.2@21.377,62.443 Q1.2@22.86,62.443
  Top Layer w5: Q1.2@22.86,62.443 56.764,62.443 63.373,55.834 63.373,55.588 69.241,49.72 69.487,49.72 74.803,44.404 74.803,11.176 73.66,10.033 64.008,10.033 60.96,13.081
  Signal Layer 2 w0.3: v1(20.066,14.859) 19.797,14.59 19.797,2.682 v1(21.209,1.27)
  Bottom Layer w0.3: v1(21.209,1.27) 29.981,1.27 30.779,0.472 55.797,0.472 57.113,1.788 57.113,3.215 56.813,3.515 56.813,6.265 58.968,8.42 58.968,9.77 58.198,10.541 58.166,10.541 R38.1@58.166,10.795 56.159,10.795 U4.1@56.007,10.947 ; 57.506,12.217 57.607,12.319 57.657,12.319
  Bottom Layer w0.4: U4.1@53.467,13.487 54.003,14.023 C18.2@54.003,16.891
  Bottom Layer w0.7: U4.1@53.467,10.947 U4.1@53.467,12.217 U4.1@53.467,13.487 U4.1@54.737,13.487 U4.1@56.007,13.487 U4.1@56.007,12.217 ; U4.1@53.492,10.947 U4.1@54.737,10.947 ; U4.1@54.737,12.217 U4.1@56.007,12.217 ; U4.1@56.007,10.947 U4.1@56.007,12.217
  Bottom Layer w3: U4.1@56.007,12.217 57.506,12.217 ; 57.657,12.319 57.657,13.716
  other v1: 58.166,12.573 58.928,12.573 58.166,13.462 58.928,13.462 58.166,14.478 58.928,14.478 58.166,15.24
pads on no net: H4.7 H4.9 U1.3 U1.4 U1.7 U1.25 U1.26 U1.39 U1.41 U1.43 U1.44 U1.45 U1.46 U1.52 U1.53 U1.54 U1.59 U1.60 U1.65 U1.66 U1.67 U1.68 U1.69 U1.71 U1.78 U1.79 U1.80 U1.85 U1.87 U1.88 U1.90 U1.91 U1.96 U1.97 U1.98 U4.3 U4.5 U7.18 U7.19 U7.21 U7.22 U7.23 U7.24 U7.28 U7.29 U7.30 U7.32 U7.33 U7.36 U7.40 U7.41 U7.43 U7.44 U7.45 U7.46 U7.48 U7.52 U7.53 U7.54 U7.55 U7.57 U7.58 U7.59

## Polygon pours and split planes (outlines as drawn)
GND_STM on Signal Layer 2 "Top Layer - GND" (solid, remove dead copper, pour order 4): -0.508,-4.064 -0.508,84.963 79.502,84.963 79.502,-4.064
GND_STM on Bottom Layer "Top Layer - GND" (solid, remove dead copper, pour order 6): -0.508,-4.064 -0.508,84.963 79.502,84.963 79.502,-4.064
GND_STM on Signal Layer 1 "Top Layer - GND" (solid, remove dead copper, pour order 2): -0.508,-4.064 -0.508,84.963 79.502,84.963 79.502,-4.064
GND_STM on Top Layer "GND_STM_L01_P000" (solid, remove dead copper, pour order 0): -0.508,-4.064 -0.508,84.963 79.502,84.963 79.502,-4.064

## Keep-outs
Keep-Out Layer:
  the board outline again, w0.254

## Other copper
Bottom Layer:
  rectangle net GND_STM: 42.926,5.461 55.245,8.763
  rectangle net GND_STM: 42.926,4.191 46.609,5.588
  rectangle net GND_STM: 48.006,8.636 51.308,13.97
  rectangle net V_MOTOR: 53.086,10.541 56.515,13.97
  rectangle net 5V_SERVO: 42.799,9.271 47.498,13.843

## Silkscreen, mask and mechanical layers (free items; w line width, h text height)
Top Overlay:
  text "Ninja Car Version 3.4" at 6.35,82.677 h1.52
  text "Zachary Asmussen" at 6.223,81.407 h0.76
Bottom Overlay:
  text "Ninja Car Version 3.4" at 36.957,82.804 h1.52
  text "Zachary Asmussen" at 37.084,81.407 h0.76
Top Solder:
  lines w0.3: 30.861,69.342 30.861,70.358
  lines w3: 19.298,70.606 19.547,70.358 20.32,70.358 21.59,70.358 23.241,70.358 ; 21.59,72.009 21.78,71.819 ; 24.13,70.358 24.643,70.358 ; 30.861,70.358 32.131,70.358 33.401,70.358 35.941,70.358 ; 35.179,71.633 35.179,72.39 ; 36.197,70.614 36.454,70.358 ; 43.18,70.358 44.45,70.358 45.72,70.358 48.26,70.358 48.773,70.358
  lines w3.5: 20.066,64.389 20.32,64.389
  lines w5: 21.336,62.484 45.847,62.484 46.101,62.23 ; 21.59,72.009 21.59,74.676 ; 35.179,72.39 35.179,74.676 ; 47.773,71.776 47.773,72.599 48.641,73.468 48.641,74.676
Bottom Solder:
  lines w0.3: 31.941,52.583 34.002,54.644 ; 32.073,52.451 32.891,51.632 ; 36.166,51.046 36.166,51.787 36.83,52.451
  lines w1: 43.878,54.089 43.878,54.877 43.561,55.195 43.561,58.547 51.424,58.547 51.424,57.774 ; 49.905,51.44 51.181,52.716 51.181,57.531
  lines w3: 18.034,54.031 18.034,57.531 ; 18.288,57.531 19.558,57.531 ; 19.304,57.531 20.574,57.531 23.114,57.531 ; 20.625,57.48 20.625,51.44 21.636,52.451 25.781,52.451 29.497,52.451 29.798,52.15 31.416,52.15 31.717,52.451 32.073,52.451 ; 23.368,53.34 23.368,56.942 ; 31.895,52.451 35.128,52.451 ; 32.603,56.162 31.941,56.824 31.941,57.531 32.703,57.531 33.972,57.531 ; 32.704,53.413 32.704,56.061 ; 34.002,54.644 36.195,52.451 36.83,52.451 ; 35.306,52.451 35.306,56.292 34.02,57.578 36.465,57.578 ; 37.025,57.531 36.512,57.531 36.83,57.213 36.83,52.451 ; 47.371,53.974 47.371,57.531 ; 49.905,51.44 49.905,57.525 ; 50.424,57.531 49.911,57.531 47.371,57.531 ; 36.83,52.451 36.877,52.404 40.433,52.404 40.48,52.451 40.546,52.451 40.593,52.404 42.211,52.404 42.258,52.451 44.831,52.451 44.831,53.627 44.878,53.674 44.878,57.484 44.831,57.531 46.101,57.531 47.371,57.531
  lines w5: 21.59,66.294 21.59,74.676 ; 35.179,66.294 35.179,74.676 ; 48.641,66.294 48.641,74.676